# Altium PCB Touch v2.2.PcbDoc
Units mil, origin at the board's own origin, x right, y up, seen from the top; angles counter-clockwise.
Board outline 1968.5 x 1566.93 mil, 2 copper layers (Top Layer, Bottom Layer); 17 components, 31 nets, 68 pads, 32 vias.
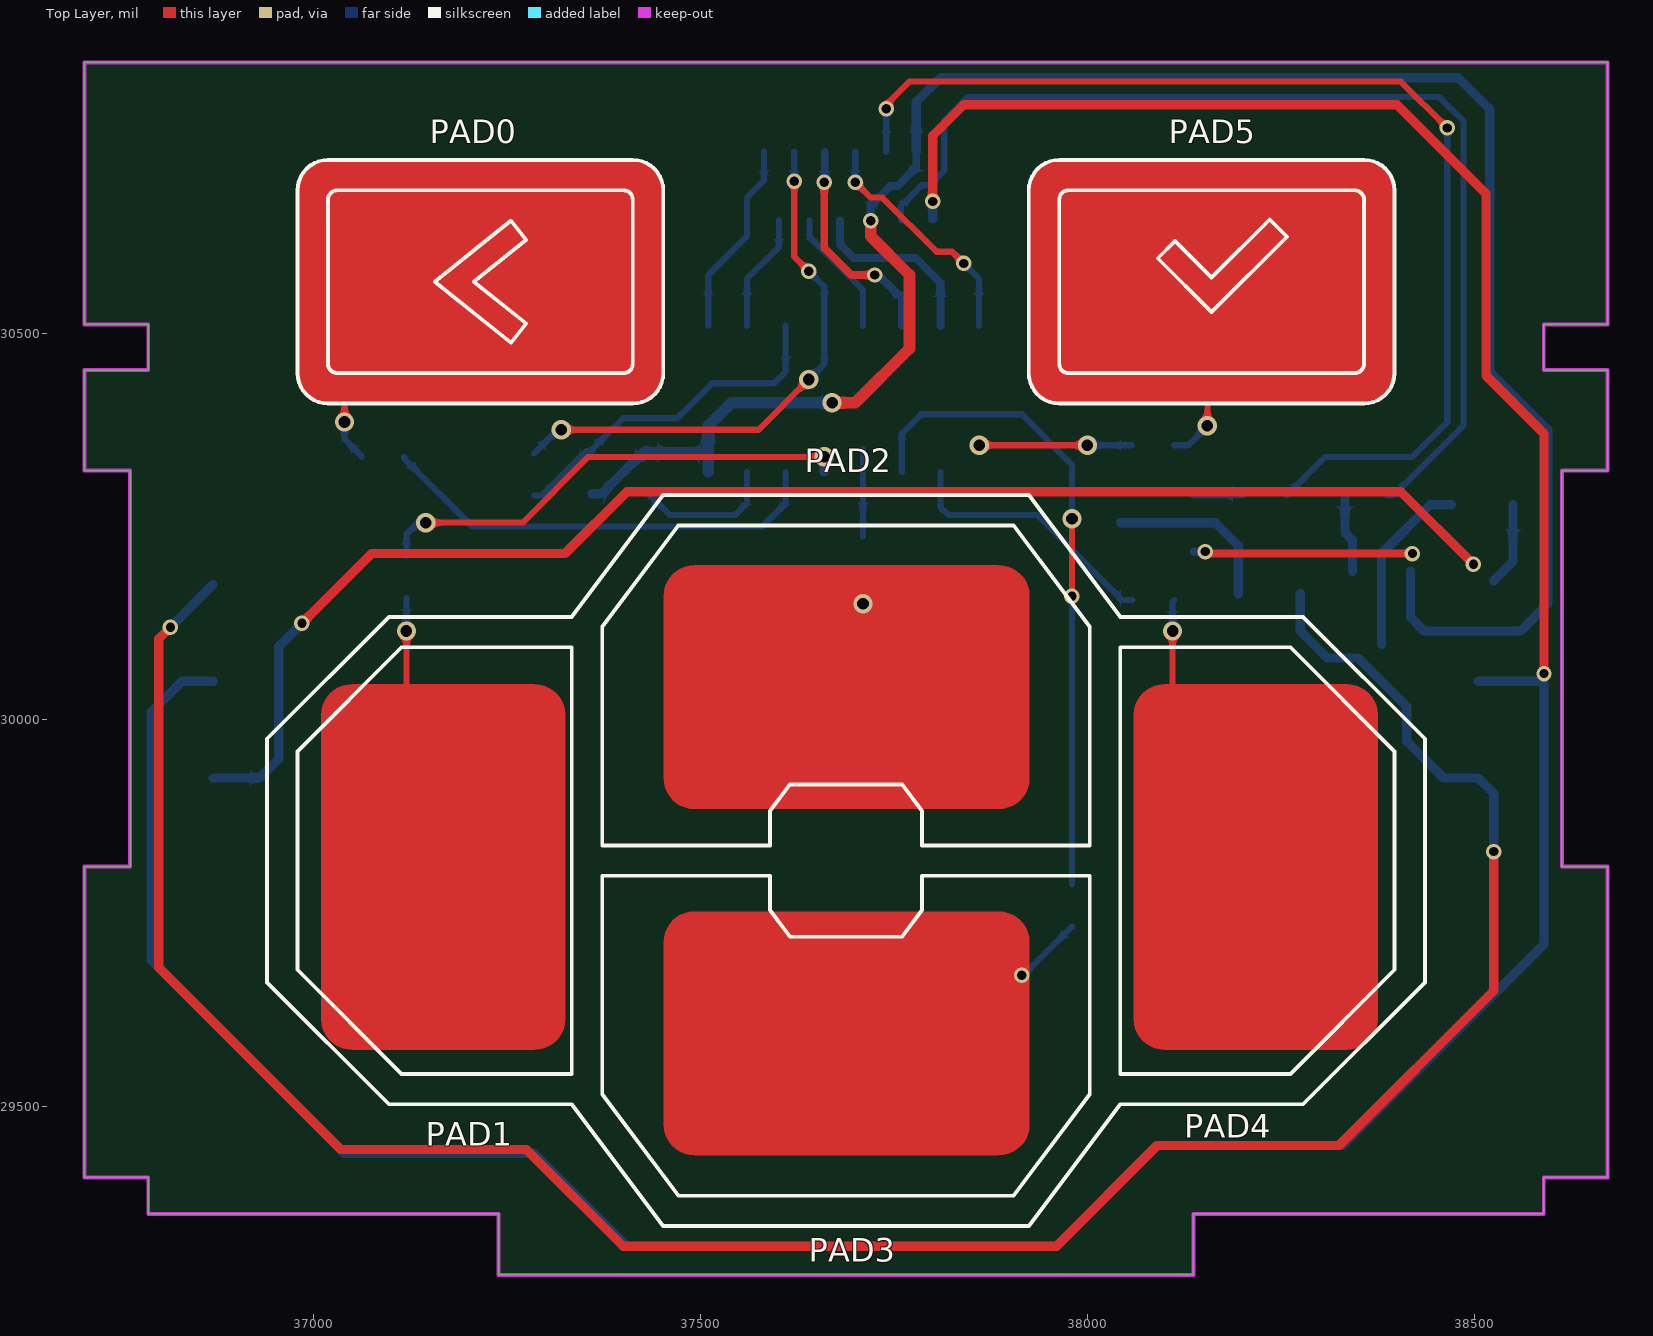
[diagram p0: Top Layer view]
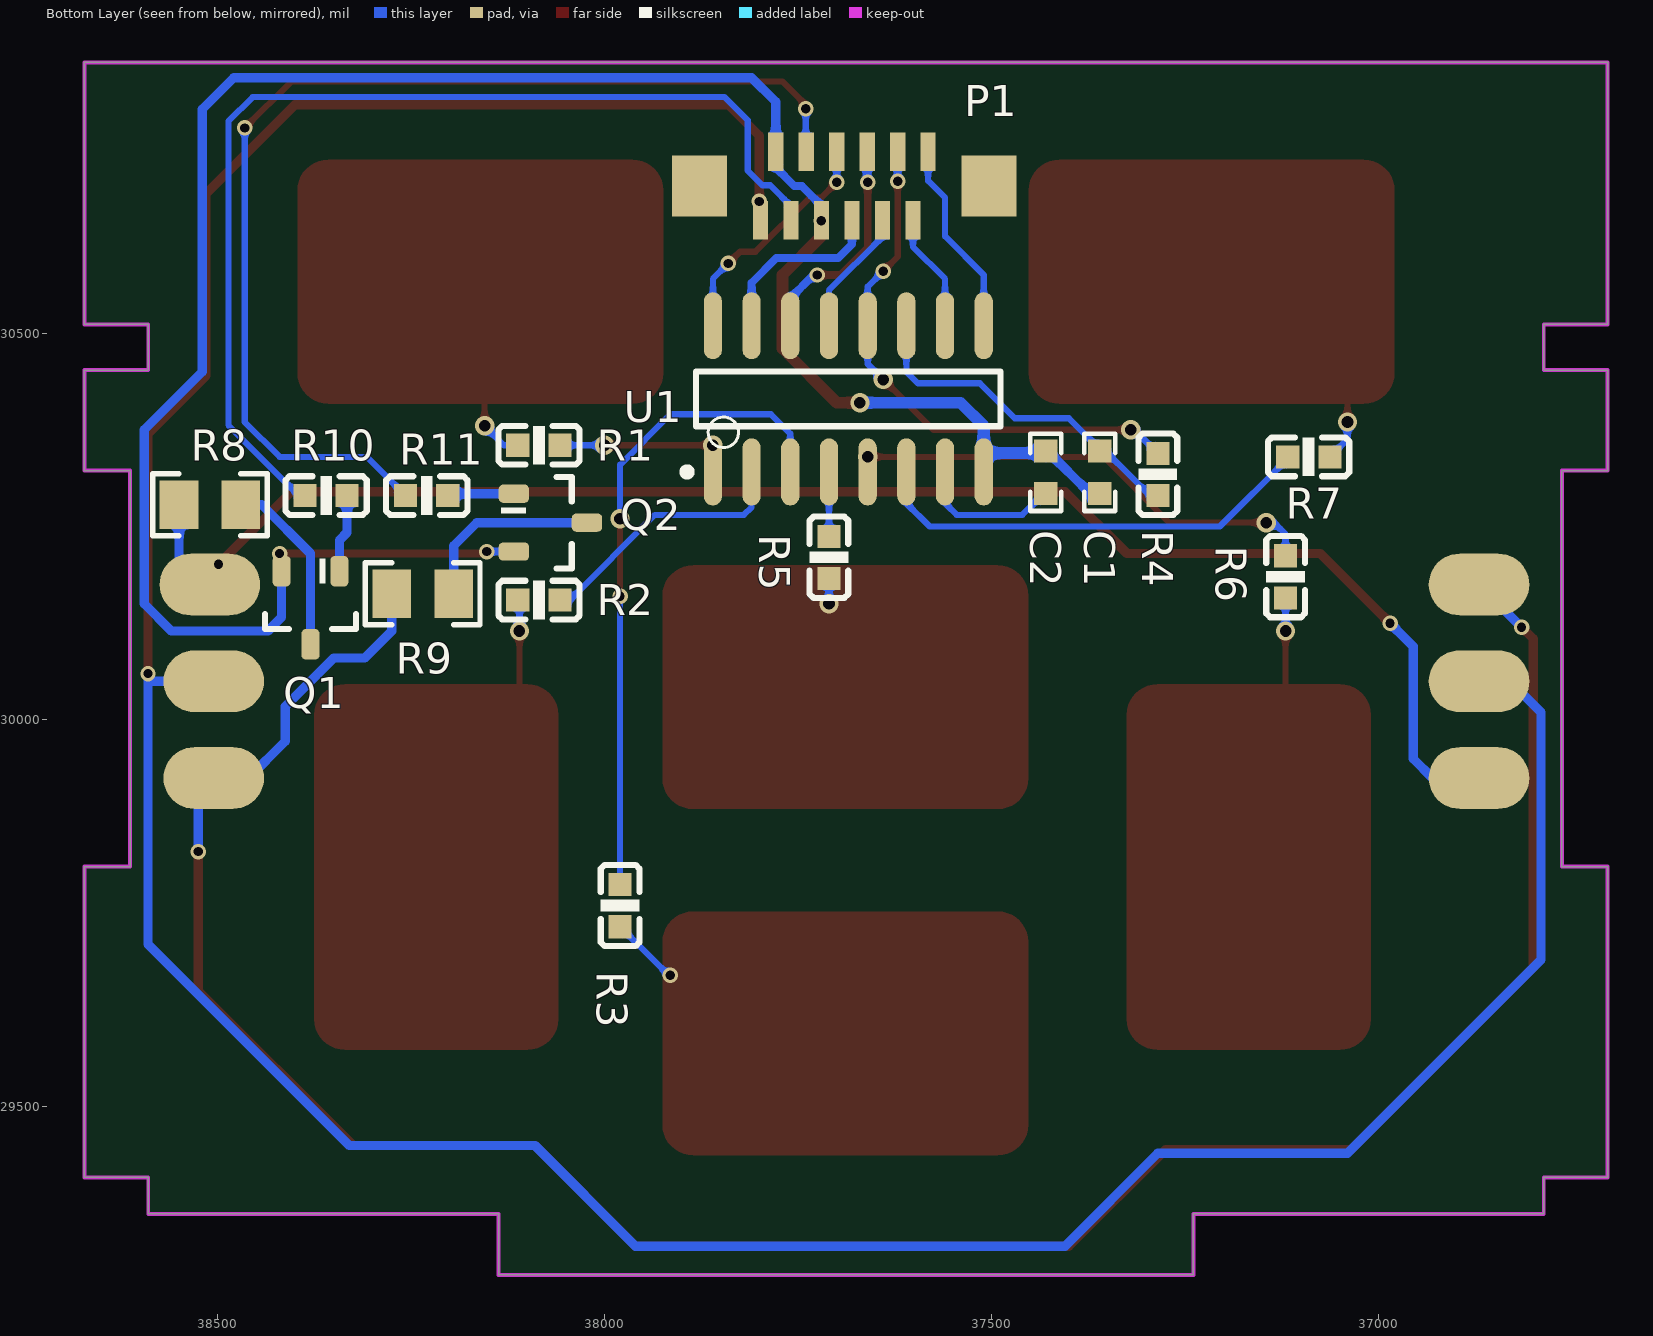
[diagram p1: Bottom Layer view, seen from below]

## Layer stack, top to bottom
Top Solder: solder mask 0.4, Solder Resist, Dk 3.5
Top Layer: signal copper 1.4
Dielectric1: dielectric 12.6, FR-4, Dk 4.8
Bottom Layer: signal copper 1.4
Bottom Solder: solder mask 0.4, Solder Resist, Dk 3.5

## Board outline
36703.76,29408.88 36703.76,29810.45 36762.82,29810.45 36762.82,30322.26 36703.76,30322.26 36703.76,30452.18 36786.44,30452.18 36786.44,30511.24 36703.76,30511.24 36703.76,30849.82 38672.27,30849.82 38672.27,30511.24 38589.59,30511.24 38589.59,30452.18 38672.27,30452.18 38672.27,30322.26 38613.21,30322.26 38613.21,29810.45 38672.27,29810.45 38672.27,29408.88 38589.59,29408.88 38589.59,29361.63 38136.83,29361.63 38136.83,29282.89 37239.19,29282.89 37239.19,29361.63 36786.44,29361.63 36786.44,29408.88

## Design rules (kind name [scope] priority, off if disabled: settings)
Clearance [All] p1: gap=7
PolygonConnect [All] p1: connectstyle=Relief reliefconductorwidth=10 reliefentries=4 polygonreliefangle="90 Angle" airgapwidth=10
RoomDefinition SHEET1 [InComponentClass('SHEET1')] p1: confinementstyle=ConfineIn formatcopy=TRUE lockcomponents=FALSE outline 36703.76,29280 38665,29280 38665,30852.54 36703.76,30852.54
RoutingVias [All] p1: holewidth=28 width=50 viastyle="Through Hole" minholewidth=12 minwidth=20 maxholewidth=28 maxwidth=50
SilkToSolderMaskClearance SilkscreenOverComponentPads [IsPad] p1: minsilkscreentomaskgap=10 clearancetoexposedcopper=TRUE
SolderMaskExpansion [All] p1: expansion=4
Width [All] p1: maxlimit=15 minlimit=8 preferedwidth=10
29 further rules are at their usual default settings.

## Components (designator, comment, footprint, x,y, rotation, side; value= is the part's Value field where it differs from the comment)
C1 "C0805" 0603C 37360,30320 r270 bottom
C2 "C0805" 0603C 37430,30320 r90 bottom
P1 "FPC 0.5mm 12P" "FPC 12P 0.5mm V" 37700,30690 r0 bottom
Q1 "3904" SOT-23 38380,30145 r270 bottom
Q2 "3904" SOT-23 38070,30255 r180 bottom
R1 "RES" 0603R 38085,30355 r180 bottom
R2 "RES" 0603R 38085,30155 r180 bottom
R3 "RES" 0603R 37980,29760 r90 bottom
R4 "RES" 0603R 37285,30317.25 r90 bottom
R5 "RES" 0603R 37710,30210 r90 bottom
R6 "RES" 0603R 37120,30185 r90 bottom
R7 "RES" 0603R 37090,30340 r0 bottom
R8 "RES" 0805 38510,30280 r180 bottom
R9 "RES" 0805 38235,30165 r180 bottom
R10 "RES" 0603R 38360,30290 r180 bottom
R11 "RES" 0603R 38230,30290 r180 bottom
U1 "WTC1006BSI" SO-16_N 37685,30415 r90 bottom

## Footprints (in the part's own frame and the unit in brackets; to place one, negate y for a bottom-side part, rotate by r counter-clockwise, add the part's x,y. Pads: shape width x height; smd on the part's side, far side on the other; paste and mask are expansions set on the pad)
0603C [mil]
  rect 30x30 smd: 1(27.5,0) 2(-27.5,0)
  silkscreen extent -50,-20 50,20
0603R [mil]
  rect 30x30 smd: 1(-27.25,0) 2(27.25,0)
  silkscreen extent -52,-25 53,25
0805 [mil]
  rect 50x63 smd: 1(-40,-2) 2(40,-2)
  silkscreen extent -74,-42 74,38, body extent -43,-31 43,27, height 43
"FPC 12P 0.5mm V" [mm]
  rect 1.8x2 smd: 0(-5,0) 0(4.5,0)
  rect 0.5x1.25 smd: 1(-3,-1.125) 2(-2.5,1.125) 3(-2,-1.125) 4(-1.5,1.125) 5(-1,-1.125) 6(-0.5,1.125) 7(0,-1.125) 8(0.5,1.125) 9(1,-1.125) 10(1.5,1.125) 11(2,-1.125) 12(2.5,1.125)
SO-16_N [mm] "SOIC, 16-Leads, Body 9.9x3.9mm, Pitch 1.27mm, IPC Medium Density"
  oval 2.2x0.6 smd: 1(-2.4,4.445) 2(-2.4,3.175) 3(-2.4,1.905) 4(-2.4,0.635) 5(-2.4,-0.635) 6(-2.4,-1.905) 7(-2.4,-3.175) 8(-2.4,-4.445) 9(2.4,-4.445) 10(2.4,-3.175) 11(2.4,-1.905) 12(2.4,-0.635) 13(2.4,0.635) 14(2.4,1.905) 15(2.4,3.175) 16(2.4,4.445)
  silkscreen extent -2.52,-5 0.9,5.42, body extent -2,-5 2,5, height 1.75
SOT-23 [mm]
  rrect50% 1x0.6 smd: 1(-1.2,0.95) 2(-1.2,-0.95) 3(1.2,0)
  silkscreen extent -1.63,-1.5 0.7,1.5, body extent -1.16,-1.45 1.21,1.45, height 1

## Part data
C1 C2: library part CAP, "Capacitor"
P1: library part "Header 12", "Header, 12-Pin"
Q1 Q2: library part MMBT3904, "NPN Switching Transistor"
R1 R2 R3 R4 R5 R6 R7 R8 R9 R10 R11: "Semiconductor Resistor"

## Free pads (board coordinates)
  oval 130x80 smd far side: 1(38510,30175) 2(38505,30050) 3(38505,29925) 4(36870,30175) 5(36870,30050) 6(36870,29925)

## Via types
v1: diameter 20, hole 12, Top Layer to Bottom Layer, tented both sides, 19 vias
v2: diameter 25, hole 15, Top Layer to Bottom Layer, tented both sides, 13 vias

## Nets (pads, with @x,y where several pads share a name; then routed paths per layer and width w, separated by ;. In a path a pad name is that pad's centre, name@x,y a point inside that pad or via, vN(x,y) a via of type N, cw(c..) or ccw(c..) an arc to the next point about the centre after c; other vN are vias at no path point)
B_LED: pad.3 pad.4 R9.1 | length 3201.1
  Top Layer w12: v1(36815,30120) 36800,30105 36800,29680 37035,29445 37275,29445 37400,29320 37960,29320 38090,29450 38325,29450 38525,29650 v1(38525,29830)
  Bottom Layer w12: v1(36815,30120) pad.4 ; R9.1 38275,30115 38310,30080 38350,30080 38412.5,30017.5 38412.5,29972.5 38460,29925 pad.3 38525,29905 v1(38525,29830)
BLUE: P1.9 R11.1 | length 1450.3
  Top Layer w8: v1(37740,30790) 37740,30795 37770,30825 38405,30825 v1(38465,30765)
  Bottom Layer w8: P1.9 37740,30734.92 v1(37740,30790) ; R11.1 38307.25,30340 38420,30340 38465,30385 v1(38465,30765)
GND: C1.1 C2.1 P1.8 P1.11 Q1.2 Q2.2 U1.8 | length 2888.9
  Top Layer w10: v1(38152.4,30217.6) 38155,30215 v1(38420,30215)
  Top Layer w15: v2(37670,30410) 37700,30410 37770,30480 37770,30575 37720,30625 v1(37720,30645)
  Bottom Layer w10: v1(37720,30645) 37720,30645.39 P1.8 37719.68,30664.69 37745,30690 37755,30690 37778.74,30713.74 P1.11 ; 38137.24,30217.6 v1(38152.4,30217.6)
  Bottom Layer w12: C1.1 37372.5,30292.5 37427.5,30347.5 C2.1 ; P1.11 37778.74,30798.74 37810,30830 38479.32,30830 38520,30789.32 38520,30450 38595,30375 38595,30150 38560,30115 38435,30115 38417.4,30132.6 Q1.2
  Bottom Layer w15: C2.1 37432.5,30345 U1.8@37510,30345 ; U1.8 U1.8@37510,30345 ; v2(37670,30410) 37540,30410 37510,30380 U1.8@37510,30345
KEY0: P1.1 U1.9 | length 254.6
  Bottom Layer w8: U1.9 37510,30575 37560,30625 37560,30675 37581.89,30696.89 P1.1
KEY1: P1.2 U1.10 | length 153.4
  Bottom Layer w8: U1.10 37560,30570 37601.57,30611.57 P1.2
KEY2: P1.4 U1.13 | length 164.8
  Bottom Layer w8: P1.4 37640.94,30624.06 37710,30555 U1.13
KEY3: P1.5 U1.14 | length 287
  Top Layer w10: v1(37660,30695) 37660,30610 37695,30575 v1(37725,30575)
  Bottom Layer w10: v1(37660,30695) 37660.63,30695.63 P1.5 ; v1(37725,30575) 37730,30575 37760,30545 U1.14
KEY4: P1.6 U1.15 | length 236.8
  Bottom Layer w10: P1.6 37680.32,30614.69 37698,30597 37778,30597 37810,30565 U1.15
KEY5: P1.7 U1.16 | length 311.6
  Top Layer w8: v1(37700,30695) 37720,30675 37735,30675 37805,30605 37825,30605 v1(37840,30590)
  Bottom Layer w8: v1(37700,30695) P1.7 ; v1(37840,30590) 37860,30570 U1.16
NetC1_2: C1.2 R4.1 U1.11 | length 452.2
  Bottom Layer w8: R4.1 37295,30290 37352.5,30347.5 C1.2 37360,30350 37400,30390 37470,30390 37515,30435 37595,30435 37610,30450 U1.11
NetC2_2: C2.2 U1.7 | length 188.1
  Bottom Layer w8: C2.2 37432.5,30292.5 37460,30265 37545,30265 37560,30280 U1.7
NetQ1_1: Q1.1 R10.2 | length 101.8
  Bottom Layer w12: R10.2 38332.75,30242.25 38342.6,30232.4 Q1.1
NetQ1_3: Q1.3 R8.2 | length 233.3
  Bottom Layer w12: Q1.3 38380,30215 38443,30278 R8.2
NetQ2_1: Q2.1 R11.2 | length 63.1
  Bottom Layer w12: 38137.24,30292.4 R11.2@38200.35,30292.4
NetQ2_3: Q2.3 R9.2 | length 226.7
  Bottom Layer w12: 38042.76,30255 38165,30255 38195,30225 R9.2
NetR1_2: R1.2 U1.1 | length 197.8
  Top Layer w8: v2(37860,30355) v2(38000,30355)
  Bottom Layer w8: v2(38000,30355) R1.2
NetR2_2: R2.2 U1.2 | length 343
  Bottom Layer w8: U1.2 37810,30275 37820,30265 37935,30265 38045,30155 R2.2
NetR3_2: R3.2 U1.3 | length 849.5
  Top Layer w8: v1(37980,30160) v2(37980,30260)
  Bottom Layer w8: U1.3 37760,30370 37785,30395 37915,30395 37980,30330 v2(37980,30260) ; R3.2 v1(37980,30160)
NetR5_2: R5.2 U1.4 | length 112.8
  Bottom Layer w8: R5.2 U1.4 U1.4@37710,30350
NetR6_2: R6.2 U1.5 | length 628.7
  Top Layer w8: v2(37145,30255) 37270,30255 37355,30340 v2(37660,30340)
  Bottom Layer w8: R6.2 37120,30240 37135,30255 v2(37145,30255)
  Bottom Layer w12: U1.5 v2(37660,30340)
NetR7_2: R7.2 U1.6 | length 584.3
  Bottom Layer w8: R7.2 37117.25,30337.75 37205,30250 37580,30250 37610,30280 U1.6
PAD0: R7.1 | length 91.5
  Top Layer w8: 37035,30420 37040,30415 v2(37040,30385)
  Bottom Layer w8: v2(37040,30385) 37040,30362.75 R7.1
PAD1: R6.1 | length 137.8
  Top Layer w8: 37120,30020 v2(37120,30115)
  Bottom Layer w8: v2(37120,30115) R6.1
PAD2: R5.1 | length 32.8
  Bottom Layer w8: v2(37710,30150) R5.1
PAD3: R3.1 | length 91
  Bottom Layer w8: v1(37915,29670) 37917.25,29670 R3.1
PAD4: R2.1 | length 160.1
  Top Layer w8: v2(38110,30115) 38110,30010 38120,30000
  Bottom Layer w8: v2(38110,30115) 38110,30152.75 R2.1
PAD5: R1.1 | length 98.1
  Top Layer w8: v2(38155,30380) 38155,30425
  Bottom Layer w8: R1.1 38130,30355 v2(38155,30380)
R_LED: pad.1 pad.6 R8.1 | length 2014.2
  Top Layer w12: v1(36985,30125) 37075,30215 37325,30215 37405,30295 38405,30295 v1(38498.76,30201.24)
  Bottom Layer w12: pad.6 36930,29925 36955,29950 36955,30095 v1(36985,30125) ; pad.1@38525,30180 38550,30205 R8.1
RED: P1.10 R10.1 | length 1383.9
  Bottom Layer w8: P1.10 37759.06,30664.06 37786,30691 37796,30691 37815,30710 37815,30775 37845,30805 38454.7,30805 38486,30773.7 38486,30381 38395,30290 R10.1
VCC: P1.12 pad.2 pad.5 | length 4494.4
  Top Layer w12: v1(37800,30670) 37800,30755 37840,30795 38400,30795 38515,30680 38515,30445 38590,30370 v1(38590,30060)
  Bottom Layer w12: pad.5 36830,30050 36790,30010 36790,29690 37040,29440 37285,29440 37405,29320 37960,29320 38090,29450 38330,29450 38590,29710 38590,30050 pad.2 ; P1.12@37800,30647.28 v1(37800,30670)
VDD: P1.3 R4.2 U1.12 | length 713.2
  Top Layer w8: v2(37320,30375) 37575,30375 v2(37640,30440) ; v1(37621.26,30696.26) 37621.26,30598.74 v1(37640,30580)
  Bottom Layer w8: R4.2 37315.5,30375 v2(37320,30375) ; v1(37621.26,30696.26) P1.3 ; v2(37640,30440) 37660,30460 U1.12 37660,30560 v1(37640,30580)
pads on no net: P1.0

## Keep-outs
Keep-Out Layer:
  the board outline again, w5

## Other copper
Top Layer:
  region net PAD0: 36979.35,30448.25 36979.35,30684.47 cw(c37018.72,30684.47) 37018.72,30723.84 37412.42,30723.84 cw(c37412.42,30684.47) 37451.79,30684.47 37451.79,30448.25 cw(c37412.42,30448.25) 37412.42,30408.88 37018.72,30408.88 cw(c37018.72,30448.25)
  region net PAD5: 37924.23,30448.25 ccw(c37963.6,30448.25) 37963.6,30408.88 38357.3,30408.88 ccw(c38357.3,30448.25) 38396.67,30448.25 38396.67,30684.47 ccw(c38357.3,30684.47) 38357.3,30723.84 37963.6,30723.84 ccw(c37963.6,30684.47) 37924.23,30684.47
  region net PAD2: 37452.56,29924.37 ccw(c37491.93,29924.37) 37491.93,29885 37885.63,29885 ccw(c37885.63,29924.37) 37925,29924.37 37925,30160.59 ccw(c37885.63,30160.59) 37885.63,30199.96 37491.93,30199.96 ccw(c37491.93,30160.59) 37452.56,30160.59
  region net PAD1: 37285.63,29573.78 ccw(c37285.63,29613.15) 37325,29613.15 37325,30006.85 ccw(c37285.63,30006.85) 37285.63,30046.22 37049.41,30046.22 ccw(c37049.41,30006.85) 37010.04,30006.85 37010.04,29613.15 ccw(c37049.41,29613.15) 37049.41,29573.78
  region net PAD3: 37925,29713.11 ccw(c37885.63,29713.11) 37885.63,29752.48 37491.93,29752.48 ccw(c37491.93,29713.11) 37452.56,29713.11 37452.56,29476.89 ccw(c37491.93,29476.89) 37491.93,29437.52 37885.63,29437.52 ccw(c37885.63,29476.89) 37925,29476.89
  region net PAD4: 38099.37,30046.22 ccw(c38099.37,30006.85) 38060,30006.85 38060,29613.15 ccw(c38099.37,29613.15) 38099.37,29573.78 38335.59,29573.78 ccw(c38335.59,29613.15) 38374.96,29613.15 38374.96,30006.85 ccw(c38335.59,30006.85) 38335.59,30046.22

## Silkscreen, mask and mechanical layers (free items; w line width, h text height)
Top Overlay:
  lines w5: 36939.98,29660.85 37097.46,29503.37 37333.68,29503.37 37451.79,29345.88 37924.23,29345.88 38042.34,29503.37 38278.56,29503.37 38436.04,29660.85 38436.04,29975.81 38278.56,30133.29 38042.34,30133.29 37924.23,30290.77 37451.79,30290.77 37333.68,30133.29 37097.46,30133.29 36939.98,29975.81 36939.98,29660.85 ; 36979.35,29677.15 36979.35,29959.5 37113.77,30093.92 37333.68,30093.92 37333.68,29542.74 37113.77,29542.74 36979.35,29677.15 ; 36979.35,30448.25 ccw(c37018.72,30448.25) 37018.72,30408.88 37412.42,30408.88 ccw(c37412.42,30448.25) 37451.79,30448.25 37451.79,30684.47 ccw(c37412.42,30684.47) 37412.42,30723.84 37018.72,30723.84 ccw(c37018.72,30684.47) 36979.35,30684.47 36979.35,30448.25 ; 37018.72,30460.06 ccw(c37030.53,30460.06) 37030.53,30448.25 37400.61,30448.25 ccw(c37400.61,30460.06) 37412.42,30460.06 37412.42,30672.66 ccw(c37400.61,30672.66) 37400.61,30684.47 37030.53,30684.47 ccw(c37030.53,30672.66) 37018.72,30672.66 37018.72,30460.06 ; 37156.52,30566.36 37254.95,30487.62 37274.63,30512.21 37206.94,30566.36 37274.63,30620.5 37254.95,30645.1 37156.52,30566.36 ; 37373.05,29516.49 37373.05,29798.64 37589.59,29798.64 37589.59,29754.6 37615.61,29719.9 37760.41,29719.9 37786.44,29754.6 37786.44,29798.64 38002.97,29798.64 38002.97,29516.49 37904.55,29385.26 37471.48,29385.26 37373.05,29516.49 ; 37373.05,29838.01 37589.59,29838.01 37589.59,29882.05 37615.61,29916.75 37760.41,29916.75 37786.44,29882.05 37786.44,29838.01 38002.97,29838.01 38002.97,30120.16 37904.55,30251.4 37471.48,30251.4 37373.05,30120.16 37373.05,29838.01 ; 37924.23,30448.25 ccw(c37963.6,30448.25) 37963.6,30408.88 38357.3,30408.88 ccw(c38357.3,30448.25) 38396.67,30448.25 38396.67,30684.47 ccw(c38357.3,30684.47) 38357.3,30723.84 37963.6,30723.84 ccw(c37963.6,30684.47) 37924.23,30684.47 37924.23,30448.25 ; 37963.6,30460.06 ccw(c37975.41,30460.06) 37975.41,30448.25 38345.49,30448.25 ccw(c38345.49,30460.06) 38357.3,30460.06 38357.3,30672.66 ccw(c38345.49,30672.66) 38345.49,30684.47 37975.41,30684.47 ccw(c37975.41,30672.66) 37963.6,30672.66 37963.6,30460.06 ; 38042.34,29542.74 38042.34,30093.92 38262.26,30093.92 38396.67,29959.5 38396.67,29677.15 38262.26,29542.74 38042.34,29542.74 ; 38090.86,30596.58 38160.45,30526.99 38257.89,30624.42 38235.62,30646.69 38160.45,30571.53 38113.13,30618.86 38090.86,30596.58
  text "PAD0" at 37150,30745 h30
  text "PAD5" at 38105,30745 h30
  text "PAD2" at 37635,30320 h30
  text "PAD4" at 38125,29460 h30
  text "PAD1" at 37145,29450 h30
  text "PAD3" at 37640,29300 h30